# Altium PCB PCB2.PcbDoc
Units mm, origin at the board's own origin, x right, y up, seen from the top; angles counter-clockwise.
Board outline 63.25 x 36.32 mm, 4 copper layers (Top Layer, Internal Plane 1, Internal Plane 2, Bottom Layer); 26 components, 34 nets, 147 pads, 4 vias.
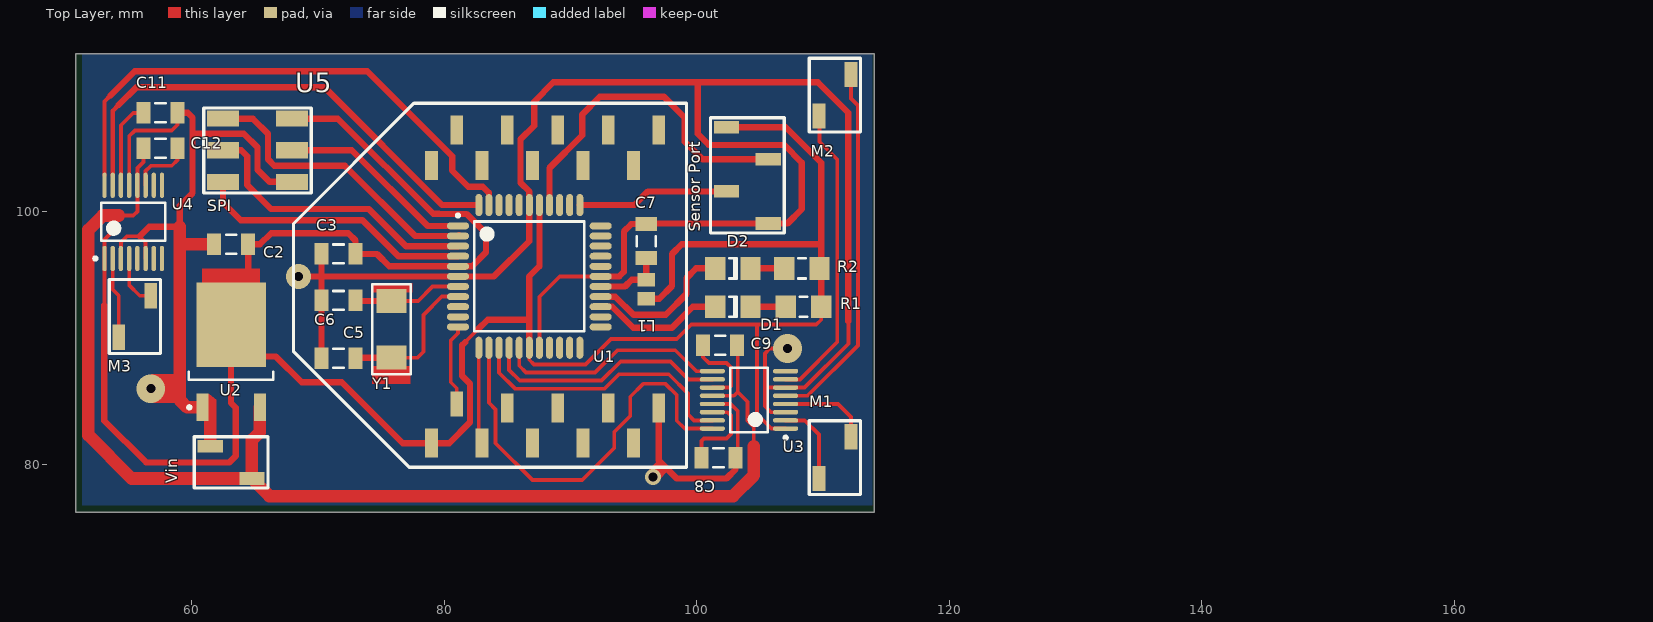
[diagram p0: Top Layer view]
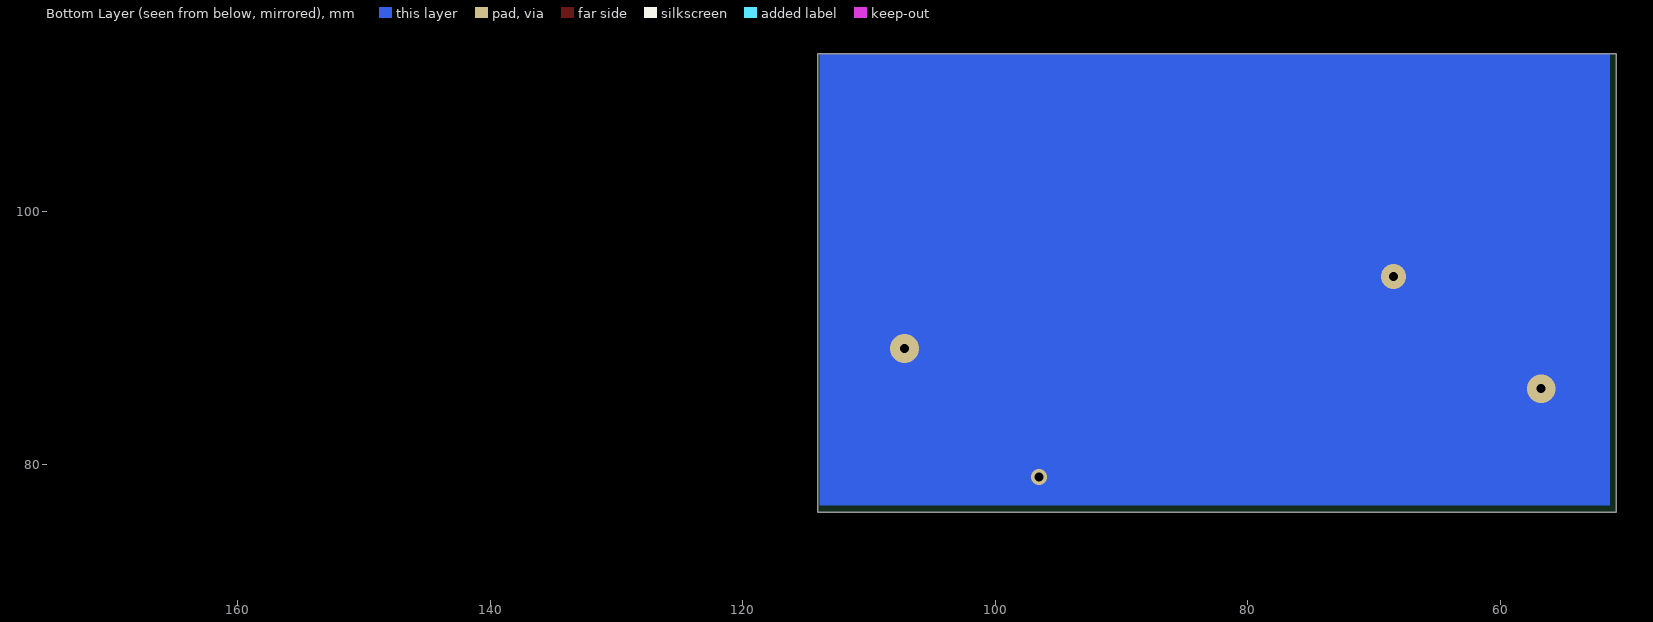
[diagram p1: Bottom Layer view, seen from below]
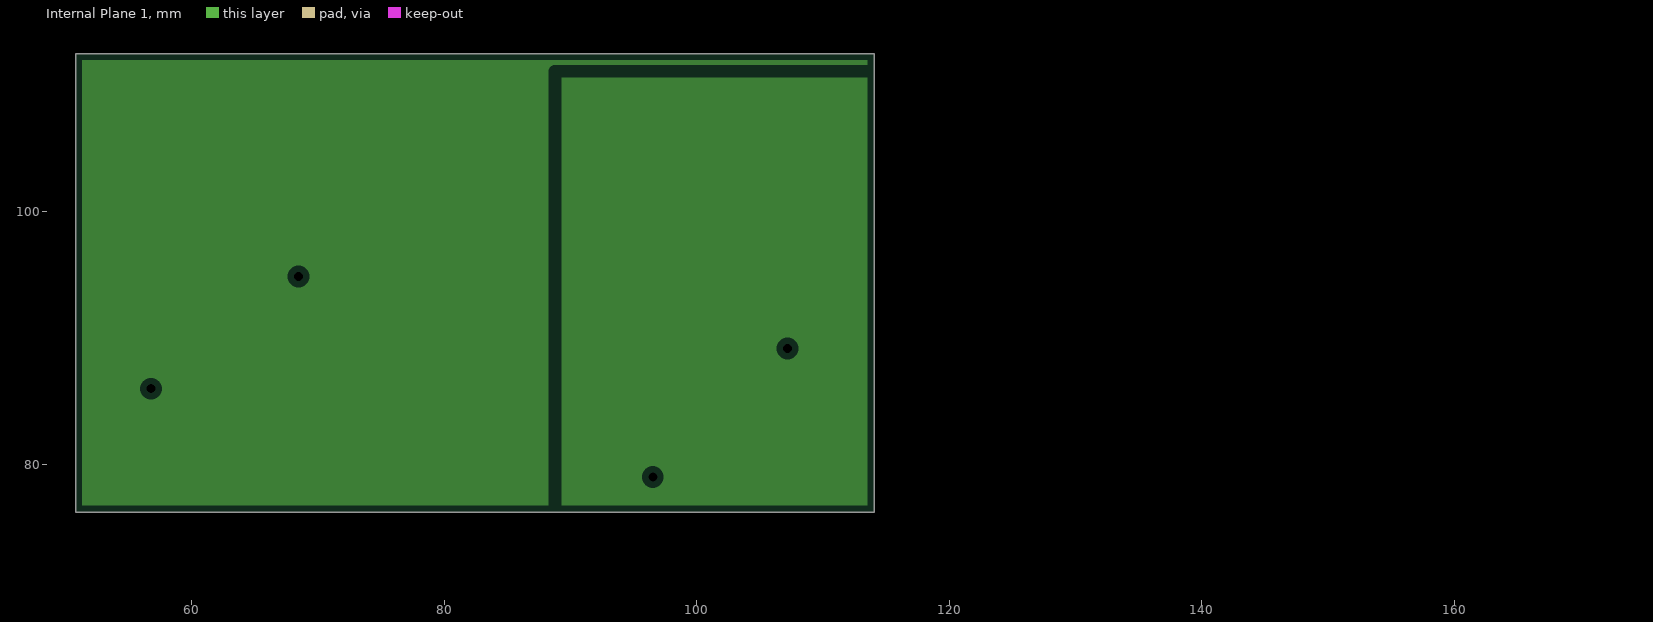
[diagram p2: Internal Plane 1, clearances drawn from the general rule]
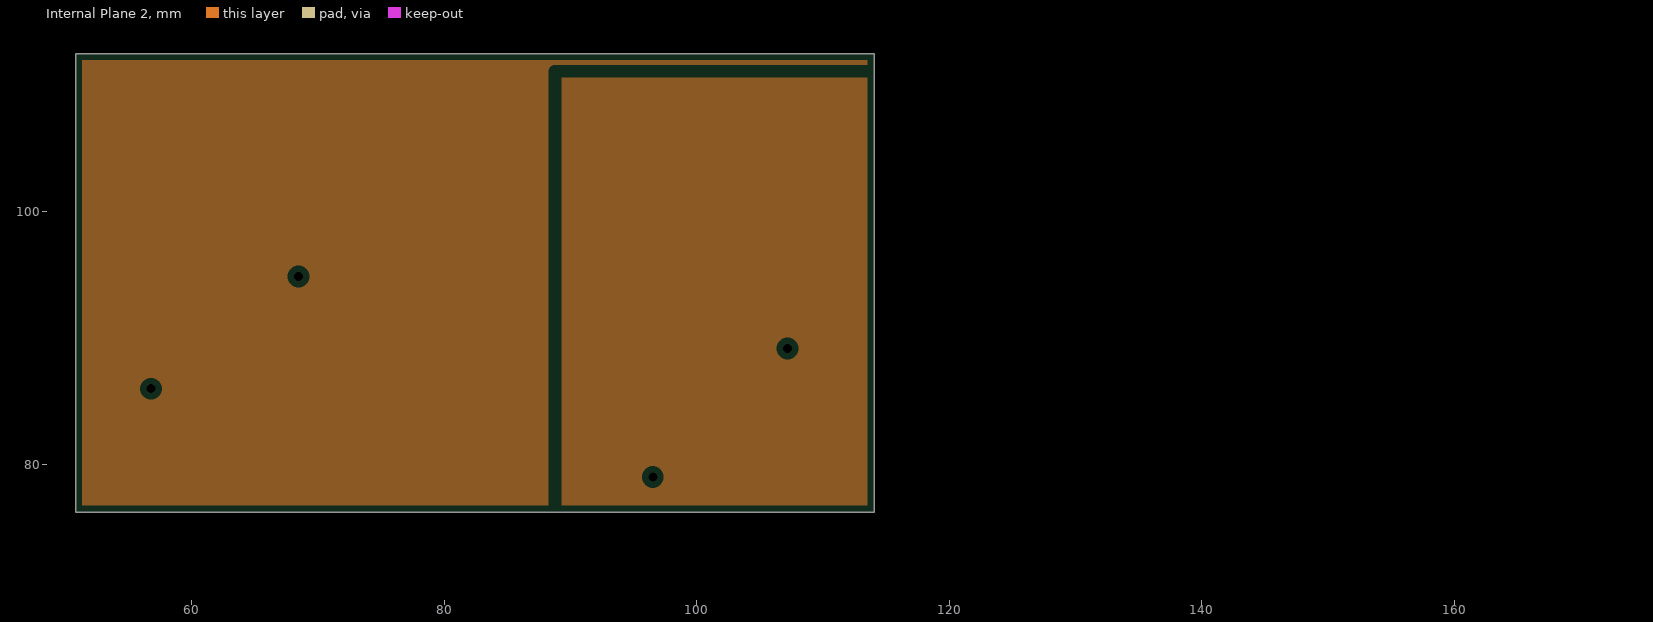
[diagram p3: Internal Plane 2, clearances drawn from the general rule]

## Layer stack, top to bottom
Top Layer: signal copper 0.0356
Dielectric: dielectric 0.32, FR-4, Dk 4.8
Internal Plane 1: plane copper 0.0356
Dielectric: dielectric 0.32, FR-4, Dk 4.8
Internal Plane 2: plane copper 0.0356
Dielectric: dielectric 0.32, FR-4, Dk 4.8
Bottom Layer: signal copper 0.0356

## Board outline
50.8,76.2 114.046,76.2 114.046,112.522 50.8,112.522

## Design rules (kind name [scope] priority, off if disabled: settings)
Clearance [All] p1: gap=0.2
ComponentClearance [All] p1 off: gap=0.254 collisioncheckmode=3 verticalgap=0.254 showdistances=FALSE
PlaneClearance [All] p1: clearance=0.508
PlaneConnect [All] p1: planeconnectstyle=Relief reliefexpansion=0.508 reliefentries=4 reliefconductorwidth=0.254 reliefairgap=0.254
PolygonConnect [All] p1: connectstyle=Relief reliefconductorwidth=0.254 reliefentries=4 polygonreliefangle="90 Angle"
RoomDefinition Schematic_v1 [InComponentClass('Schematic_v1')] p1: confinementstyle=ConfineIn formatcopy=TRUE lockcomponents=FALSE outline 51.181,76.418 113.792,76.418 113.792,112.522 51.181,112.522
RoutingVias [All] p1: holewidth=0.6 width=1 viastyle="Through Hole" minholewidth=0.711 minwidth=1.27 maxholewidth=0.711 maxwidth=1.27
SilkscreenOverComponentPads [All] p1: minsilkscreentomaskgap=0.254
SolderMaskExpansion [All] p1: expansion=0.102
Width [All] p1: maxlimit=4 minlimit=0.2 preferedwidth=0.2 minimp=50.000000 maximp=50.000000 favimp=50.000000
24 further rules are at their usual default settings.

## Components (designator, comment, footprint, x,y, rotation, side; value= is the part's Value field where it differs from the comment)
C2 "Cap" C1206 63.119,97.409 r0 top
C3 "Cap" C1206 71.628,96.647 r0 top
C5 "Cap" C1206 71.628,88.392 r0 top
C6 "Cap" C1206 71.628,92.964 r0 top
C7 "Cap" C1206 96.012,97.663 r270 top
C8 "Cap" C1206 101.727,80.518 r0 top
C9 "Cap" C1206 101.854,89.408 r0 top
C11 "Cap" C1206 57.531,107.823 r0 top
C12 "Cap" C1206 57.531,105.029 r180 top
D1 "LED0" 1206 102.87,92.456 r180 top
D2 "LED0" 1206 102.87,95.504 r180 top
L1 "Inductor" C0805 96.012,93.853 r270 top
M1 "Header 2" "SMD Header 2" 109.681,78.867 r0 top
M2 "Header 2" "SMD Header 2" 109.681,107.569 r0 top
M3 "Header 2" "SMD Header 2" 54.229,90.043 r0 top
R1 "Res1" 8-1206 108.458,92.456 r180 top
R2 "Res1" 8-1206 108.331,95.504 r180 top
"Sensor Port" "Header 4" "SMD HEADER 4" 102.362,106.68 r0 top
SPI "Header 3X2" "SMD MALE HEADER 3x2" 67.945,102.362 r180 top
U1 "ATmega1284P-AU" 44A_N 86.741,94.869 r0 top
U2 "LD1086DT33TR" TO-252AA_M 63.119,88.9 r90 top
U3 "Dual H-Bridge Motor Driver" TSSOP16_M 104.14,85.09 r180 top
U4 "Dual H-Bridge Motor Driver" TSSOP16_M 55.372,99.187 r90 top
U5 "Xbee" Xbee 78.994,81.661 r90 top
Vin "Header 2" "SMD Header 2" 64.77,78.867 r90 top
Y1 "XTAL" ECX-64A 75.819,90.678 r90 top

## Footprints (in the part's own frame and the unit in brackets; to place one, negate y for a bottom-side part, rotate by r counter-clockwise, add the part's x,y. Pads: shape width x height; smd on the part's side, far side on the other; paste and mask are expansions set on the pad)
8-1206 [mm] "Chip Resistor; Body 3.1 x 1.6 mm (LxW typ)"
  rect 1.6x1.8 smd: 1(-1.4,0) 2(1.4,0)
  silkscreen extent -0.3,-0.8 0.3,0.8
44A_N [mm] "Thin QFP, 44-Leads, Body 10x10mm, Pitch 0.8mm, IPC Medium Density"
  oval 1.75x0.55 smd: 1(-5.65,4) 2(-5.65,3.2) 3(-5.65,2.4) 4(-5.65,1.6) 5(-5.65,0.8) 6(-5.65,0) 7(-5.65,-0.8) 8(-5.65,-1.6) 9(-5.65,-2.4) 10(-5.65,-3.2) 11(-5.65,-4) 23(5.65,-4) 24(5.65,-3.2) 25(5.65,-2.4) 26(5.65,-1.6) 27(5.65,-0.8) 28(5.65,0) 29(5.65,0.8) 30(5.65,1.6) 31(5.65,2.4) 32(5.65,3.2) 33(5.65,4)
  oval 0.55x1.75 smd: 12(-4,-5.65) 13(-3.2,-5.65) 14(-2.4,-5.65) 15(-1.6,-5.65) 16(-0.8,-5.65) 17(0,-5.65) 18(0.8,-5.65) 19(1.6,-5.65) 20(2.4,-5.65) 21(3.2,-5.65) 22(4,-5.65) 34(4,5.65) 35(3.2,5.65) 36(2.4,5.65) 37(1.6,5.65) 38(0.8,5.65) 39(0,5.65) 40(-0.8,5.65) 41(-1.6,5.65) 42(-2.4,5.65) 43(-3.2,5.65) 44(-4,5.65)
  silkscreen extent -5.77,-4.35 4.35,4.95, body extent -5,-5 5,5, height 1.2
1206 [mm] "Chip Capacitor; Body 3.2 x 1.6 mm (LxW typ)"
  rect 1.6x1.8 smd: 1(-1.4,0) 2(1.4,0)
  silkscreen extent -0.3,-0.8 0.3,0.8
C0805 [mm] "Chip Capacitor, Body 2.0x1.3mm, IPC High Density"
  rect 1.1x1.4 smd: 1(-0.75,0) 2(0.75,0)
  body extent -1.1,-0.72 1.1,0.72, height 1.4
C1206 [mm] "Chip Capacitor, Body 3.2x1.6mm, IPC High Density"
  rect 1.1x1.7 smd: 1(-1.35,0) 2(1.35,0)
  silkscreen extent -0.4,-0.75 0.4,0.75, body extent -1.7,-0.9 1.7,0.9, height 1.3
ECX-64A [mm]
  rect 1.9x2.4 smd: 1(-2.25,0) 2(2.25,0)
  silkscreen extent -3.56,-1.52 3.56,1.52
"SMD Header 2" [mm]
  rect 1x2 smd: 1(0,0) 2(2.54,3.3)
  silkscreen extent -0.76,-1.27 3.3,4.57
"SMD HEADER 4" [mm]
  rect 2x1 smd: 1(0,0) 2(3.3,-2.54) 3(0,-5.08) 4(3.3,-7.62)
  silkscreen extent -1.27,-8.38 4.57,0.76
"SMD MALE HEADER 3x2" [mm]
  rect 2.54x1.27 smd: 1(0,0) 2(0,-2.5) 3(0,-5) 4(5.46,-5) 5(5.46,-2.5) 6(5.46,0)
  silkscreen extent -1.52,-5.84 6.98,0.89
TO-252AA_M [mm] "D-PAK, 4-Leads, Body 6.1x6.5mm, Pitch 2.28mm, Lead Span 9.8mm, IPC Low Density"
  rect 2.2x0.95 smd: 1(-4.4,2.28) 3(-4.4,-2.28)
  rect 6.7x5.5 smd: 4(2.15,0)
  silkscreen extent -4.52,-3.35 -1.6,3.43, body extent -2.2,-3.35 4,3.35, height 2.38
TSSOP16_M [mm] "TSOP, 16-Leads, Body 5x4.4mm, Pitch 0.65mm, IPC Low Density"
  oval 2x0.35 smd: 1(-2.9,2.275) 2(-2.9,1.625) 3(-2.9,0.975) 4(-2.9,0.325) 5(-2.9,-0.325) 6(-2.9,-0.975) 7(-2.9,-1.625) 8(-2.9,-2.275) 9(2.9,-2.275) 10(2.9,-1.625) 11(2.9,-0.975) 12(2.9,-0.325) 13(2.9,0.325) 14(2.9,0.975) 15(2.9,1.625) 16(2.9,2.275)
  silkscreen extent -3.03,-2.55 1.5,3.12, body extent -2.25,-2.55 2.25,2.55, height 1.1
Xbee [mm]
  rect 2.29x1 smd: 1(0,0) 3(0,-4) 4(2.79,-6) 5(0,-8) 6(2.79,-10) 7(0,-12) 8(2.79,-14) 9(0,-16) 10(2.79,-18) 11(24.79,-18) 12(22,-16) 13(24.79,-14) 14(22,-12) 15(24.79,-10) 16(22,-8) 17(24.79,-6) 18(22,-4) 19(24.79,-2) 20(22,0)
  rect 2x1 smd: 2(3.102,-2)
  silkscreen extent -1.91,-20.19 26.92,10.92

## Part data
C2 C3 C5 C6 C7 C8 C9 C11 C12: "Capacitor"
D1 D2: "Typical INFRARED GaAs LED"
M1 M2 M3 Vin: "Header, 2-Pin"
R1 R2: "Resistor"
"Sensor Port": "Header, 4-Pin"
SPI: "Header, 3-Pin, Dual row"
U1: "20 MHz 8-bit AVR Microcontroller with 128KB Flash, 44-Pin TQFP Pkg, Industrial Temp"
U2: library part "Volt Reg", "Voltage Regulator"
U3 U4: library part DRV8833
Y1: "Crystal"

## Via types
v1: diameter 2.27, hole 0.711, Top Layer to Bottom Layer, 2 vias
v2: diameter 1.27, hole 0.711, Top Layer to Bottom Layer, 1 vias
v3: diameter 2, hole 0.711, Top Layer to Bottom Layer, 1 vias

## Nets (pads, with @x,y where several pads share a name; then routed paths per layer and width w, separated by ;. In a path a pad name is that pad's centre, name@x,y a point inside that pad or via, vN(x,y) a via of type N, cw(c..) or ccw(c..) an arc to the next point about the centre after c; other vN are vias at no path point)
GND: "Sensor Port.4" C2.1 C3.1 C5.1 C6.1 C7.1 C8.2 C11.2 SPI.1 U1.6 U1.18 U1.28 U1.39 U2.1 U3.3 U3.6 U3.13 U4.3 U4.6 U4.13 U5.10 Vin.2 | length 220.8
  Top Layer w0.3: U4.3 54.397,97.577 54.864,98.044 55.88,98.044 56.347,97.577 U4.6 ; U4.13 55.047,105.974 55.499,106.426 58.42,106.426 58.881,106.887 C11.2 ; U1.18 87.541,93.256 89.154,94.869 U1.28 ; U3.13 102.687,84.765 103.243,84.209 103.243,80.684 C8.2 ; 105.41,86.065 U3.6 108.544,86.065 112.014,89.535 112.014,91.313 ; U3.3 105.877,84.115 105.41,84.582 105.41,88.773 105.791,89.154 v1(107.188,89.154)
  Top Layer w0.5: 55.88,98.044 56.642,98.806 59.055,98.806 59.055,100.457 60.071,101.473 60.071,106.172 ; C11.2 59.69,107.823 60.071,107.442 60.071,106.172 ; SPI.1 66.167,102.362 65.216,103.313 65.216,105.091 64.135,106.172 60.071,106.172 ; v3(68.453,94.869) 70.278,94.869 ; C5.1 C6.1 ; 70.278,93.853 70.278,94.869 ; C3.1 70.278,94.869 ; U1.28 93.853,94.869 94.234,95.25 94.234,98.425 94.822,99.013 C7.1 ; C7.1@96.012,99.06 105.662,99.06 107.188,99.06 108.331,100.203 108.331,103.886 106.934,105.283 100.965,105.283 100.076,106.172 100.076,110.236 ; U5.10 96.994,80.298 98.425,78.867 102.362,78.867 103.077,79.582 C8.2 ; 112.014,91.313 112.014,107.823 109.601,110.236 88.646,110.236 87.122,108.712 87.122,106.807 86.044,105.729 86.044,102.297 86.741,101.6 U1.39 86.741,97.663 83.947,94.869 U1.6 70.278,94.869
  Top Layer w1: 59.055,98.806 59.055,97.536 ; U2.1 59.645,84.5 59.055,85.09 59.055,97.536 ; C2.1 59.182,97.409 59.055,97.536
  other v1: 56.769,85.979
  other v2: 96.52,78.994
LED1: D1.2 U1.25 | length 10.5
  Top Layer w0.5: U1.25 93.32,92.469 94.984,90.805 98.044,90.805 99.695,92.456 D1.2
LED2: D2.2 U1.26 | length 11.9
  Top Layer w0.5: U1.26 93.548,93.269 94.996,91.821 97.536,91.821 99.187,93.472 99.187,94.742 99.949,95.504 D2.2
MISO: SPI.4 U1.2 | length 23.8
  Top Layer w0.5: SPI.4 64.85,107.362 66.04,106.172 66.04,104.14 66.548,103.632 72.136,103.632 77.699,98.069 U1.2 U1.2@81.166,98.144
MOSI: SPI.2 U1.1 | length 15.6
  Top Layer w0.5: SPI.2 72.684,104.862 78.677,98.869 U1.1
MOTOR1_A: U1.14 U3.15 | length 22.4
  Top Layer w0.3: U1.14 84.341,87.236 85.598,85.979 92.71,85.979 93.853,87.122 97.79,87.122 99.314,85.598 99.314,83.947 99.796,83.465 U3.15
MOTOR1_B: U1.13 U3.16 | length 33.6
  Top Layer w0.3: U1.13 83.541,84.861 84.074,84.328 84.074,81.661 86.995,78.74 90.932,78.74 93.472,81.28 93.472,82.55 94.742,83.82 94.742,85.344 95.758,86.36 97.536,86.36 98.425,85.471 98.425,83.439 99.049,82.815 U3.16
MOTOR2_A: U1.16 U3.9 | length 18.4
  Top Layer w0.3: U1.16 85.941,87.795 86.487,87.249 91.948,87.249 93.726,89.027 98.298,89.027 99.96,87.365 U3.9
MOTOR2_B: U1.15 U3.10 | length 19.4
  Top Layer w0.3: U1.15 85.141,87.452 85.979,86.614 92.456,86.614 93.98,88.138 97.917,88.138 99.34,86.715 U3.10
MOTOR3_A: U1.43 U4.16 | length 42.9
  Top Layer w0.35: U4.16@53.097,102.849 53.097,108.723 53.594,109.22
  Top Layer w0.5: 53.594,109.22 55.499,111.125 73.914,111.125 80.645,104.394 80.645,103.251 81.915,101.981 83.058,101.981 83.541,101.498 U1.43
MOTOR3_B: U1.44 U4.15 | length 38.8
  Top Layer w0.35: U4.15@53.747,102.849 53.747,107.976 54.229,108.458
  Top Layer w0.5: 54.229,108.458 55.626,109.855 70.519,109.855 79.855,100.519 U1.44
NetC5_2: C5.2 U1.8 Y1.1 | length 11.8
  Top Layer w0.3: Y1.1 77.887,88.428 78.359,88.9 78.359,91.821 79.807,93.269 U1.8
  Top Layer w0.5: C5.2@73.014,88.428 Y1.1
NetC6_2: C6.2 U1.7 Y1.2 | length 8.5
  Top Layer w0.3: Y1.2 77.942,92.928 79.083,94.069 U1.7
  Top Layer w0.5: C6.2@73.014,92.928 Y1.2
NetC7_2: C7.2 L1.1 U1.27 | length 5.6
  Top Layer w0.5: U1.27 94.323,94.069 94.857,94.603 L1.1 C7.2
NetC8_1: C8.1 U3.14 | length 6.9
  Top Layer w0.3: C8.1 100.377,81.835 100.584,82.042 102.362,82.042 102.743,82.423 102.743,83.82 102.448,84.115 U3.14
NetC9_1: C9.1 U3.11 | length 6.5
  Top Layer w0.3: C9.1 100.504,88.472 100.965,88.011 102.362,88.011 102.743,87.63 102.743,86.233 102.575,86.065 U3.11
NetC11_1: C11.1 U4.14 | length 6.9
  Top Layer w0.3: U4.14 54.397,106.848 55.372,107.823 C11.1
NetC12_1: C12.1 U4.11 | length 5
  Top Layer w0.3: U4.11 56.347,103.21 56.769,103.632 58.42,103.632 58.881,104.093 C12.1
NetD1_1: D1.1 R1.2 | length 2.8
  Top Layer w0.5: D1.1 R1.2
NetD2_1: D2.1 R2.2 | length 2.7
  Top Layer w0.5: D2.1 R2.2
NetM1_1: M1.1 U3.2 | length 6.6
  Top Layer w0.3: U3.2 108.559,83.465 109.681,82.343 M1.1
NetM1_2: M1.2 U3.4 | length 7.2
  Top Layer w0.3: U3.4 111.196,84.765 112.221,83.74 M1.2
NetM2_1: M2.1 U3.7 | length 23.8
  Top Layer w0.3: U3.7 108.178,86.715 111.125,89.662 111.125,104.14 109.728,105.537 109.728,107.522 M2.1
NetM2_2: M2.2 U3.5 | length 29.1
  Top Layer w0.3: U3.5 108.783,85.415 112.776,89.408 112.776,108.411 112.221,108.966 M2.2
NetM3_1: M3.1 U4.2 | length 6.4
  Top Layer w0.3: U4.2 53.747,93.827 54.229,93.345 M3.1
NetM3_2: M3.2 U4.4 | length 4.2
  Top Layer w0.3: U4.4 55.047,94.178 55.882,93.343 M3.2
RESET: SPI.6 U1.4 | length 22
  Top Layer w0.5: SPI.6 62.485,100.71 63.881,99.314 73.533,99.314 76.378,96.469 U1.4
RXD: U1.11 U5.2 | length 6.5
  Top Layer w0.3: U5.2 80.994,86.011 80.518,86.487 80.518,89.789 81.091,90.362 U1.11
SCK: SPI.5 U1.3 | length 23.1
  Top Layer w0.5: SPI.5 63.921,104.862 64.389,104.394 64.389,102.108 66.294,100.203 74.041,100.203 76.975,97.269 U1.3
SENS1: "Sensor Port.2" U1.37 | length 26.7
  Top Layer w0.5: U1.37 88.341,103.454 90.932,106.045 90.932,107.696 92.329,109.093 97.409,109.093 99.06,107.442 99.06,105.537 100.457,104.14 105.662,104.14
SENS2: "Sensor Port.3" U1.34 | length 12.1
  Top Layer w0.5: U1.34 95.058,100.519 96.139,101.6 102.362,101.6
TXD: U1.12 U5.3 | length 7.7
  Top Layer w0.3: U1.12 82.741,81.914 U5.3
VCC: "Sensor Port.1" C2.2 C3.2 L1.2 R1.1 R2.1 SPI.3 U1.5 U1.17 U1.38 U2.4 U3.1 U4.1 U5.1 | length 209.4
  Top Layer w0.3: 53.086,92.583 53.086,96.276 U4.1 53.097,97.801 53.848,98.552 ; 81.661,89.662 82.677,90.678 ; U1.17 86.741,88.265 87.122,87.884 91.186,87.884 93.218,89.916 98.425,89.916 99.568,91.059 109.474,91.059 109.858,91.443 R1.1 ; 104.775,91.059 104.775,83.947 105.907,82.815 U3.1
  Top Layer w0.5: 53.086,92.583 53.086,83.439 56.388,80.137 62.992,80.137 63.5,80.645 63.5,84.455 63.119,84.836 U2.4@63.119,89.653 ; U2.4@61.896,90.876 U2.4@63.119,89.653 ; U2.4@64.215,90.749 U2.4@63.119,89.653 ; U2.4@64.469,92.4 U2.4 ; 64.516,94.996 64.469,95.043 C2.2 65.405,97.409 66.294,98.298 72.39,98.298 72.978,97.71 C3.2 74.676,96.647 75.654,95.669 U1.5 82.207,95.669 83.312,96.774 83.312,98.273 81.766,99.819 79.565,99.819 79.562,99.822 79.121,99.822 71.581,107.362 SPI.3 ; 81.661,89.662 81.407,89.408 81.407,86.995 82.042,86.36 82.042,83.312 80.391,81.661 U5.1 76.708,81.661 71.882,86.487 68.707,86.487 66.675,88.519 64.643,88.519 U2.4 ; 82.677,90.678 83.439,91.44 86.741,91.44 ; U1.17 86.741,91.44 ; U1.38 87.541,95.669 86.741,94.869 86.741,91.44 ; L1.2@96.012,93.091 97.028,93.091 98.044,94.107 98.044,96.647 98.806,97.409 109.858,97.409 ; 102.362,106.68 107.061,106.68 109.858,103.883 R1.1 ; U2.4@63.119,89.653 U2.4
VIN: C9.2 C12.2 U2.3 U3.12 U4.12 Vin.1 | length 100.2
  Top Layer w0.3: 54.229,99.695 55.372,99.695 55.697,100.02 U4.12 ; U4.12@55.673,102.111 U4.12 ; C12.2 56.181,103.933 55.697,103.449 U4.12 ; U3.12 102.941,85.415 103.243,85.717 ; C9.2 103.243,89.369 103.243,85.717 ; 104.521,81.407 104.521,82.951 104.013,83.459 104.013,84.947 103.243,85.717
  Top Layer w1: 54.229,99.695 52.959,99.695 51.816,98.552 51.816,82.296 55.245,78.867 Vin.1 ; U2.3 65.399,82.544 64.77,81.915 Vin.1 ; 104.521,81.407 104.521,79.121 102.87,77.47 66.167,77.47 Vin.1
pads on no net: U1.9 U1.10 U1.19 U1.20 U1.21 U1.22 U1.23 U1.24 U1.29 U1.30 U1.31 U1.32 U1.33 U1.35 U1.36 U1.40 U1.41 U1.42 U3.8 U4.5 U4.7 U4.8 U4.9 U4.10 U5.4 U5.5 U5.6 U5.7 U5.8 U5.9 U5.11 U5.12 U5.13 U5.14 U5.15 U5.16 U5.17 U5.18 U5.19 U5.20

## Polygon pours and split planes (outlines as drawn)
no net on Internal Plane 1 (split plane): 113.536,76.71 89.283,76.71 89.283,110.615 113.536,110.615
no net on Internal Plane 1 (split plane): 113.536,111.635 88.773,111.635 88.673,111.626 88.578,111.597 88.489,111.549 88.412,111.486 88.349,111.409 88.301,111.32 88.272,111.225 88.263,111.125 88.263,76.71 51.31,76.71 51.31,112.012 113.536,112.012
no net on Internal Plane 2 (split plane): 113.536,76.71 89.283,76.71 89.283,110.615 113.536,110.615
no net on Internal Plane 2 (split plane): 113.536,111.635 88.773,111.635 88.673,111.626 88.578,111.597 88.489,111.549 88.412,111.486 88.349,111.409 88.301,111.32 88.272,111.225 88.263,111.125 88.263,76.71 51.31,76.71 51.31,112.012 113.536,112.012

## Other copper
Top Layer:
  rectangle net NetC6_2: 74.295,93.599 77.47,94.361
  rectangle net NetC5_2: 74.295,86.36 77.343,87.757
  rectangle net VCC: 60.833,94.234 65.405,95.504
  region net GND: 61.024,85.201 61.659,84.693 61.976,85.09 61.341,85.598
  rectangle net GND: 60.96,81.534 61.976,85.09
  rectangle net GND: 56.769,84.836 59.055,87.122
  region net GND: 96.952,78.616 97.803,79.59 96.931,80.353 96.079,79.379
Bottom Layer:
  rectangle net GND: 51.308,76.708 113.919,112.522